# Allegro board LAY-97012_A1.brd
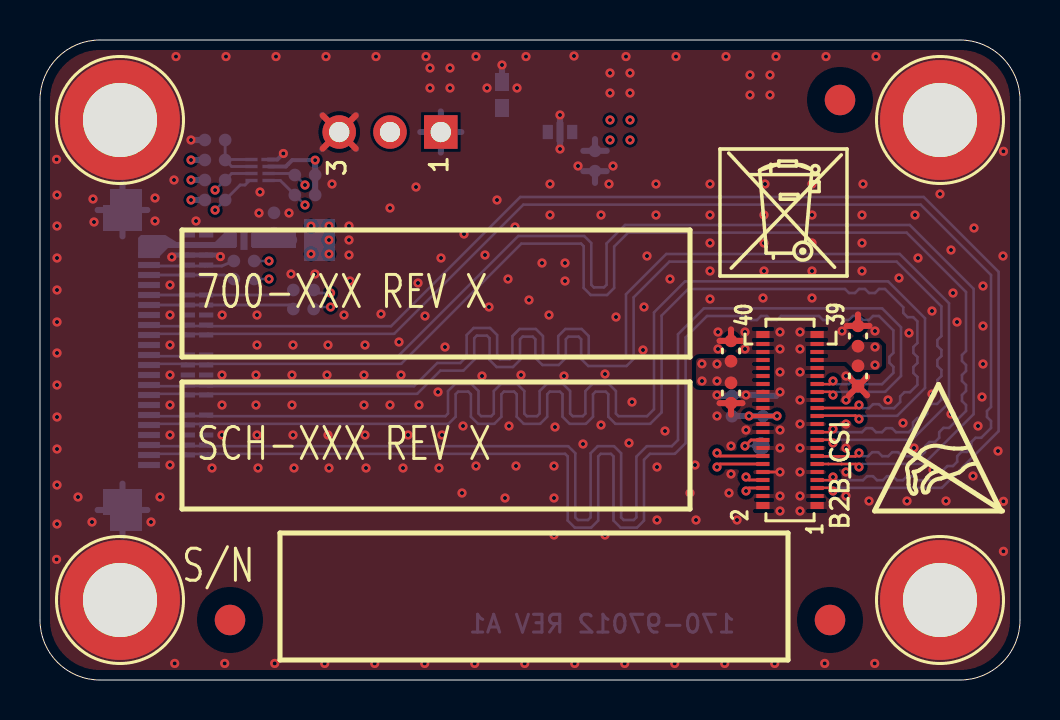
[diagram p0: board, top side]
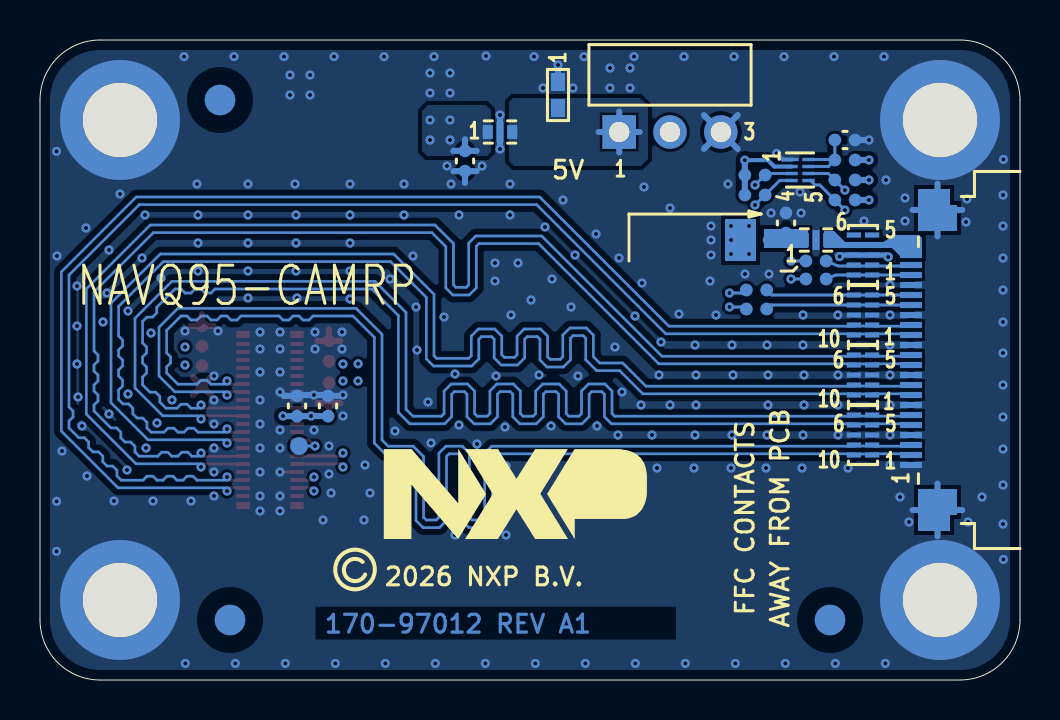
[diagram p1: board, bottom side, seen from below]

Outline 49 x 32 mm; copper layers: TOP, L2_GND1, L3_SIG1, L4_SIG2, L5_GND2, BOTTOM. Coordinates in mm from the lower left corner of the outline.
Outline path: 0,29 arc(0.88,31.12) 3,32 46,32 arc(48.12,31.12) 49,29 49,3 arc(48.12,0.88) 46,0 3,0 arc(0.88,0.88) 0,3 0,29

## Design rules (mm)
constraint set DEFAULT: min track width 0.145
net group MIPI_CSI: nets MIPI_CSI_CLK_N MIPI_CSI_D0_N MIPI_CSI_D1_N MIPI_CSI_D2_N MIPI_CSI_D3_N
net group MIPI_CSI_CLK_: nets MIPI_CSI_CLK_P
net group MIPI_CSI_D0_: nets MIPI_CSI_D0_P
net group MIPI_CSI_D1_: nets MIPI_CSI_D1_P
net group MIPI_CSI_D2_: nets MIPI_CSI_D2_P
net group MIPI_CSI_D3_: nets MIPI_CSI_D3_P
net group POWER: nets N20087079 VDD_1V8 VDD_CON_3V3

## Placement (name value [footprint] x y rotation side)
BH1  MH3.7_6  [MH236-146P]  4 28 0 top
BH2  MH3.7_6  [MH236-146P]  45 28 0 top
BH3  MH3.7_6  [MH236-146P]  4 4 0 top
BH4  MH3.7_6  [MH236-146P]  45 4 0 top
C6  0.1uF  [CC0402_25]  8.75 27 180 bottom
C7  1uF  [CC0402_25]  40.9 17.2 90 top
C8  1uF  [CC0402_25]  34.55 16.45 90 top
C9  1uF  [CC0402_25]  34.6 13.7 90 bottom
C10  0.1uF  [CC0402_25]  34.55 14.35 270 top
C11  0.1uF  [CC0402_25]  36.15 13.7 90 bottom
C12  0.1uF  [CC0402_25]  40.9 15.2 270 top
C13  0.1uF  [CC0402_25]  11.7 22.85 90 bottom
C14  0.1uF  [CC0402_25]  27.75 25.95 270 bottom
D1  IP4292CZ10-TBR  [XSON10_0P5_1P1X2P6MM]  7.85 12.25 0 bottom
D2  IP4292CZ10-TBR  [XSON10_0P5_1P1X2P6MM]  7.85 15.25 0 bottom
D3  IP4292CZ10-TBR  [XSON10_0P5_1P1X2P6MM]  7.85 18.25 0 bottom
D4  IP4292CZ10-TBR  [XSON10_0P5_1P1X2P6MM]  7.85 21.25 0 bottom
D5  PESD0402  [0402_MLP]  23.1 29.25 270 bottom
FL1  0.1uF  [CC_FIL_0402]  26 27.4 180 bottom
FL2  0.1uF  [CC_FIL_0402]  10.2 22 180 bottom
J3  CONN FPC/FFC 22  [CON_FFC_22_0P5_SM_RA_87H]  2.45 16 90 bottom
J4  HDR 1X3 RA  [HDR1X3M_100_TH_RA]  20.04 27.4 270 bottom
NOREF  -  []  36.48 17.86 0 top
NOREF#2  -  []  47.86 28.9 0 top
NOREF#3  -  []  33.7 11.64 0 top
NOREF#4  -  []  10.57 26.02 0 top
NOREF#5  -  []  41.75 8.45 0 top
NOREF#6  -  []  10.57 24.98 90 top
NOREF#7  -  []  4 4 0 top
NOREF#8  -  []  10.2 22 0 top
NOREF#9  -  []  -409.52 -356.24 0 top
NOREF#10  -  []  6.86 28.9 0 top
NOREF#11  -  []  44.84 0 90 top
NOREF#12  -  [unnamed#2]  40 29 0 top
NOREF#13  -  []  -5.05 17.68 0 top
NOREF#14  -  []  33.23 11.64 0 top
NOREF#15  -  []  38.52 8.14 90 top
NOREF#16  -  []  9.59 22 0 top
NOREF#17  -  []  -26.08 -35.35 0 top
NOREF#18  -  []  10.81 21.64 90 top
NOREF#19  -  []  12 1 0 top
NOREF#20  -  []  5.45 10.75 90 top
NOREF#21  -  []  10.57 24.98 0 top
NOREF#22  -  []  4.9 8 90 top
NOREF#23  -  [unnamed#2]  39.5 3 0 top
NOREF#24  -  []  4.9 8 90 top
NOREF#25  -  []  7.1 8.55 0 top
NOREF#26  -  [unnamed#2]  9.5 3 0 top
NOREF#27  -  []  0.91 31.15 0 top
NOREF#28  -  []  10.5 24.82 90 top
NOREF#29  -  []  34.5 11.64 0 top
NOREF#30  -  []  34 20.2 0 top
NOREF#31  -  []  0 6.75 90 top
NOREF#32  -  []  6.86 4.9 0 top
NOREF#33  -  []  7.1 16.15 0 top
NOREF#34  -  []  47.86 4.9 0 top
NOREF#35  -  []  41.77 11.64 90 top
NOREF#36  -  []  10.5 24.82 0 top
NOREF#37  -  []  0 28.52 0 top
NOREF#38  -  []  25.39 27.4 0 top
NOREF#39  -  []  5.17 24.48 0 top
NOREF#40  -  []  33.23 11.64 0 top
NOREF#41  -  []  0 6.75 0 top
NOREF#42  -  []  -384.25 163.44 0 top
NOREF#43  -  []  5.45 10.75 90 top
NOREF#44  -  []  26.61 27.04 90 top
NOREF#45  -  []  4.9 24 90 top
NOREF#46  -  []  26 27.4 0 top
NOREF#47  -  [unnamed#2]  39.5 3 180 bottom
NOREF#48  -  []  31.8 7.05 180 bottom
NOREF#49  -  [unnamed#2]  9.5 3 180 bottom
NOREF#50  -  [unnamed#2]  40 29 180 bottom
NOREF#51  -  []  33.25 5.5 180 bottom
P14  CON PLUG 2X20  [CON_2X20_0P4_9P52X1P85_SM]  37.5 13 90 top
R5  200K  [RC0402_25]  8.75 26 0 bottom
R8  0 OHM  [RC0402_25]  13.05 22 180 bottom
R9  0 OHM  [RC0402_25]  13.18 19.5 180 bottom
R10  0 OHM  [RC0402_25]  13.18 18.55 180 bottom
R38  2.2K  [RC0402_25]  13.25 25.25 180 bottom
R39  2.2K  [RC0402_25]  13.25 24.25 180 bottom
R40  2.2K  [RC0402_25]  8.75 24 0 bottom
R41  2.2K  [RC0402_25]  8.75 25 0 bottom
R42  0 OHM  [RC0402_25]  10.2 20.05 180 bottom
R43  0 OHM  [RC0402_25]  10.2 20.95 180 bottom
TP1  TP_35MIL  [TESTPOINT_35MIL]  36.05 11.7 180 bottom
U1  PCA9306JK  [X2SON8_0P35_1X1P35MM]  11 25.5 180 bottom

## Library data of the parts
BH1-BH4 = MOUNT_HOLE
C6-C14 = CAP_NP
D1-D4 = PUSB3F96_DFN2510A_10P
D5 = DIODE_TVS_BIDIR
FL1 FL2 = EMIFILTER_NFM21P
J3 = CON22_2SH
J4 = CONN_HDR_3X1
P14 = HDR_2X20_4S
R5 R8-R10 R38-R43 = RES
TP1 = T POINT R: Tolerance: TOLERANCE; User Part Number: 510-75618
U1 = PCA9306_TSSOP8

## Footprints (pads in the part's own frame, mm; a bottom-side part is the same pattern mirrored in y, then rotated)
0402_MLP
  rect 0.9x0.7 smd: 1(-0.65,0) 2(0.65,0)
CC0402_25
  round 0.635 smd: 1(-0.508,0) 2(0.508,0)
CC_FIL_0402
  rect 0.508x0.711 smd: 1(-0.61,0) 3(0.61,0)
  rect 0.356x0.991 smd: 2(0,0)
CON_2X20_0P4_9P52X1P85_SM
  rect 0.203x0.66 smd: 1(-3.8,-1.355) 2(-3.8,1.355) 3(-3.4,-1.355) 4(-3.4,1.355) 5(-3,-1.355) 6(-3,1.355) 7(-2.6,-1.355) 8(-2.6,1.355) 9(-2.2,-1.355) 10(-2.2,1.355) 11(-1.8,-1.355) 12(-1.8,1.355) 13(-1.4,-1.355) 14(-1.4,1.355) 15(-1,-1.355) 16(-1,1.355) 17(-0.6,-1.355) 18(-0.6,1.355) 19(-0.2,-1.355) 20(-0.2,1.355) 21(0.2,-1.355) 22(0.2,1.355) 23(0.6,-1.355) 24(0.6,1.355) 25(1,-1.355) 26(1,1.355) 27(1.4,-1.355) 28(1.4,1.355) 29(1.8,-1.355) 30(1.8,1.355) 31(2.2,-1.355) 32(2.2,1.355) 33(2.6,-1.355) 34(2.6,1.355) 35(3,-1.355) 36(3,1.355) 37(3.4,-1.355) 38(3.4,1.355) 39(3.8,-1.355) 40(3.8,1.355)
  rect 0.356x0.66 smd: SH1(-4.275,-1.355) SH2(-4.275,1.355) SH3(4.275,-1.355) SH4(4.275,1.355)
CON_FFC_22_0P5_SM_RA_87H
  rect 0.305x1.092 smd: 1(-5.25,3) 2(-4.75,3) 3(-4.25,3) 4(-3.75,3) 5(-3.25,3) 6(-2.75,3) 7(-2.25,3) 8(-1.75,3) 9(-1.25,3) 10(-0.75,3) 11(-0.25,3) 12(0.25,3) 13(0.75,3) 14(1.25,3) 15(1.75,3) 16(2.25,3) 17(2.75,3) 18(3.25,3) 19(3.75,3) 20(4.25,3) 21(4.75,3) 22(5.25,3)
  custom 2.1x1.95 smd: S1(-7.5,1.675) S2(7.5,1.675)
HDR1X3M_100_TH_RA
  rect 1.676x1.676 hole 1.016: 1(0,0)
  round 1.676 hole 1.016: 2(0,2.54) 3(0,5.08)
MH236-146P
  round 5.994 hole 3.708: 1(0,0)
RC0402_25
  round 0.635 smd: 1(-0.508,0) 2(0.508,0)
TESTPOINT_35MIL
  round 0.889 smd: 1(0,0)
unnamed#2
  round 1.524 smd: (0,0)
X2SON8_0P35_1X1P35MM
  rect 0.66x0.17 smd: 1(-0.4,0.525)
  rect 0.61x0.17 smd: 2(-0.425,0.175) 3(-0.425,-0.175) 4(-0.425,-0.525) 5(0.425,-0.525) 6(0.425,-0.175) 7(0.425,0.175) 8(0.425,0.525)
XSON10_0P5_1P1X2P6MM
  rect 0.711x0.254 smd: 1(-0.457,1) 2(-0.457,0.5) 3(-0.457,0) 4(-0.457,-0.5) 5(-0.457,-1) 6(0.457,-1) 7(0.457,-0.5) 8(0.457,0) 9(0.457,0.5) 10(0.457,1)

## Nets
GND: BH1.1 BH2.1 BH3.1 BH4.1 C6.2 C7.2 C8.2 C9.2 C10.2 C11.2 C12.2 C13.2 C14.2 D1.3 D1.8 D2.3 D2.8 D3.3 D3.8 D4.3 D4.8 D5.1 FL1.2 FL2.2 J3.1 J3.4 J3.7 J3.10 J3.13 J3.16 J3.19 J3.S1 J3.S2 J4.3 P14.1 P14.2 P14.7 P14.8 P14.13 P14.14 P14.18 P14.19 P14.20 P14.24 P14.25 P14.26 P14.28 P14.31 P14.33 P14.38 P14.39 P14.40 P14.SH1 P14.SH2 P14.SH3 P14.SH4 U1.1
VDD_1V8: C9.1 C11.1 P14.22 R38.1 R39.1 U1.2
VDD_CON_3V3: D4.4 D4.7 FL2.3(OUTPUT) J3.22
VDD_SYS_3V3: C8.1 C10.1 P14.30 P14.32 P14.34 P14.36 R5.1 R8.1 R40.1 R41.1
VDD_SYS_5V0: C7.1 C12.1 C14.1 FL1.1 P14.35 P14.37
CAM1_IO1: P14.10 R10.1
CAM1_IO1_CON: D3.4 D3.7 J3.17 R10.2
CAM1_IO2: P14.12 R9.1
CAM1_IO2_CON: D3.5 D3.6 J3.18 R9.2
CCM_CLKO1_FLEXIO1_IO26: P14.16 TP1.1(TP)
CON_DISP_5V0: D5.2(A2) FL1.3(OUTPUT) J4.1
I3C2B_CAM1_SCL: P14.6 R38.2 U1.3
I3C2B_CAM1_SDA: P14.4 R39.2 U1.4
MIPI_CSI_CLK_N: D2.1 D2.10(NC4) J3.8 P14.17
MIPI_CSI_CLK_P: D2.2 D2.9 J3.9 P14.15
MIPI_CSI_D0_N: D1.1 D1.10(NC4) J3.2 P14.29
MIPI_CSI_D0_P: D1.2 D1.9 J3.3 P14.27
MIPI_CSI_D1_N: D1.4 D1.7 J3.5 P14.23
MIPI_CSI_D1_P: D1.5 D1.6 J3.6 P14.21
MIPI_CSI_D2_N: D2.4 D2.7 J3.11 P14.11
MIPI_CSI_D2_P: D2.5 D2.6 J3.12 P14.9
MIPI_CSI_D3_N: D3.1 D3.10(NC4) J3.14 P14.5
MIPI_CSI_D3_P: D3.2 D3.9 J3.15 P14.3
SCL_3V3: R41.2 R42.1 U1.6
SCL_3V3_CON: D4.1 D4.10(NC4) J3.20 R42.2
SDA_3V3: R40.2 R43.1 U1.5
SDA_3V3_CON: D4.2 D4.9 J3.21 R43.2
N20059909: C6.1 R5.2 U1.7(VREF2) U1.8
N20087079: C13.1 FL2.1 R8.2

Pads without a net: D4 5 6; J4 2

## Via types
v1: diameter 0.457, hole 0.203, TOP to BOTTOM, 313 vias

## Routing (per net, layer and track width the routed paths; a pad name or vN(x,y) marks a point on that pad's centre or on a via; arc(x,y) is an arc through that point)
GND: length 59
  TOP w0.13: v1(37,10.4) P14.8
  TOP w0.305: C10.2 35.12,13.84 ; C10.2 34.55,13.27 ; C10.2 33.98,13.84 ; C7.2 41.47,17.71 ; C7.2 40.9,18.28 ; C7.2 40.33,17.71 ; C12.2 41.35,15.15 ; C12.2 40.45,14.24 ; C12.2 41.35,14.24 ; C12.2 40.45,15.15 ; C8.2 34.55,17.53 ; C8.2 35.12,16.96 ; C8.2 33.98,16.96 ; J4.3 15.78,26.58 ; J4.3 15.78,28.22 ; J4.3 14.14,26.58 ; J4.3 14.14,28.22
  L2_GND1 w0.305: 14.12,26.55 J4.3 ; J4.3 15.8,26.55 ; J4.3 14.12,28.24 ; J4.3 15.8,28.24
  L3_SIG1 w0.305: 14.12,26.55 J4.3 ; J4.3 15.8,26.55 ; J4.3 14.12,28.24 ; J4.3 15.8,28.24
  L4_SIG2 w0.305: 14.12,28.24 J4.3 ; J4.3 15.8,28.24 ; J4.3 15.8,26.55 ; J4.3 14.12,26.55
  L5_GND2 w0.305: J4.3 15.8,28.24 ; J4.3 14.12,28.24 ; J4.3 14.12,26.55 ; J4.3 15.8,26.55
  BOTTOM w0.2: v1(12.17,26.32) 11.87,26.02 U1.1
  BOTTOM w0.25: v1(9.02,21.17) 9.01,21.17 8.93,21.25 D4.8 D4.3 6.73,21.25 6.63,21.15 v1(6.59,21.15)
  BOTTOM w0.305: 4.12,23.5 4.12,24.82 ; 4.12,23.5 4.12,22.18 ; 4.12,23.5 5.37,23.5 ; 4.12,23.5 2.88,23.5 ; J4.3 15.8,28.24 ; J4.3 15.8,26.55 ; J4.3 14.12,28.24 ; J4.3 14.12,26.55 ; v1(26,28.25) FL1.2 v1(26,26.55) ; v1(33.85,14.25) 33.89,14.21 C9.2 34.64,14.25 v1(35.3,14.25) 36.11,14.25 C11.2 36.81,14.21 v1(37,14.4) ; C6.2 v1(7.55,27) ; 4.12,7.18 J3.S1 ; J3.S1 5.37,8.5 ; J3.S1 4.12,9.82 ; J3.S1 2.88,8.5 ; 27.75,24.86 C14.2 ; C14.2 28.33,25.44 ; C14.2 27.17,25.44 ; D5.1 v1(23.1,30.75)
  vias: v1(0.83,26.03) v1(0.83,6.03) v1(0.85,24.25) v1(0.85,22.7) v1(0.85,21.1) v1(0.85,19.5) v1(0.85,17.9) v1(0.85,16.35) v1(0.85,14.75) v1(0.85,13.15) v1(0.85,11.55) v1(0.85,9.75) v1(0.85,7.8) v1(1.9,9.15) v1(2.65,24.05) v1(2.6,7.9) v1(2.7,22.9) v1(5.55,7.9) v1(5.75,24.1) v1(5.75,22.95) v1(6,9.15) v1(6.5,19.75) v1(6.5,18.25) v1(6.5,16.75) v1(6.5,15.25) v1(6.5,13.75) v1(6.5,12.25) v1(6.5,10.75) v1(6.7,25) v1(6.74,0.83) v1(6.8,31.17) v1(7.8,22.95) v1(8.6,10.6) v1(9.11,18.25) v1(9.1,15.25) v1(9.1,13.75) v1(9.1,12.25) v1(9.24,0.83) v1(9.3,31.17) v1(10.85,18.25) v1(10.85,16.75) v1(10.8,15.25) v1(10.8,13.75) v1(10.85,12.25) v1(10.9,10.6) v1(11,24.4) v1(10.95,23.35) v1(11.74,0.83) v1(11.8,31.17) v1(12.45,23.35) v1(12.55,20.3) v1(12.6,15.25) v1(12.6,13.75) v1(12.65,16.75) v1(12.65,12.25) v1(12.7,10.6) v1(13.75,20.3) v1(14.24,0.83) v1(14.3,31.17) v1(14.35,15.25) v1(14.4,16.75) v1(14.4,12.25) v1(14.45,10.6) v1(14.6,24.8) v1(15.2,18.25) v1(15.45,22.7) v1(15.45,22) v1(15.45,21.25) v1(15.5,19.95) v1(16.25,16.75) v1(16.2,15.25) v1(16.2,13.75) v1(16.25,12.25) v1(16.3,10.6) v1(16.74,0.83) v1(16.8,31.17) v1(17.05,18.3) v1(17.5,23.6) v1(17.5,13.75) v1(17.95,16.9) v1(18.05,15.25) v1(18.15,10.6) v1(18.4,12.25) v1(18.8,24.65) v1(18.9,19.85) v1(18.95,13.75) v1(19.25,18.2) v1(19.24,0.83) v1(19.3,31.17) v1(19.5,30.6) v1(19.5,29.6) v1(19.9,14.4) v1(19.95,10.6) v1(20.05,21.1) v1(20.1,12.25) v1(20.25,16.65) v1(20.5,30.6) v1(20.5,29.6) v1(21.15,12.7) v1(21.1,9.35) v1(21.2,22.3) v1(21.74,0.83) v1(21.8,31.17) v1(21.8,10.7) v1(22.1,15.2) v1(22.25,21.25) v1(22.35,29.6) v1(22.45,18.65) v1(22.85,24) v1(23.25,9.1) v1(23.4,20.05) v1(23.45,12.7) v1(23.75,22.65) v1(23.8,10.7) v1(23.85,29.6) v1(24.05,15.25) v1(24.24,0.83) v1(24.3,31.17) v1(24.45,19) v1(25.1,20.85) v1(25.45,18.25) v1(25.5,24.8) v1(25.5,23.25) v1(25.7,10.7) v1(25.7,9.1) v1(25.7,7.25) v1(25.75,12.65) v1(26.25,20.85) v1(26.25,19.95) v1(26.2,15.2) v1(26.7,31.2) v1(26.74,0.83) v1(26.9,25.7) v1(27.15,11.8) v1(28.05,23.25) v1(28.05,12.75) v1(28.25,15.3) v1(28.25,7.25) v1(28.45,24.8) v1(28.5,30.35) v1(28.5,29.35) v1(28.65,25.7) v1(28.8,18.15) v1(29.24,0.83) v1(29.3,31.17) v1(29.45,11.85) v1(29.5,30.35) v1(29.5,29.35) v1(29.6,13.9) v1(30.15,16.5) v1(30.2,18.65) v1(30.35,21.2) v1(30.8,24.8) v1(30.8,23.25) v1(30.85,10.65) v1(30.85,8) v1(31.25,12.45) v1(31.5,20.05) v1(31.74,0.83) v1(31.8,31.17) v1(32.5,9.35) v1(32.75,10.75) v1(32.8,8) v1(33.5,24.8) v1(33.5,23.25) v1(33.5,21.85) v1(33.5,20.45) v1(33.5,19.05) v1(33.9,17.4) v1(33.9,16.55) v1(33.85,13.2) v1(34.24,0.83) v1(34.3,31.17) v1(34.45,9.35) v1(34.55,11.7) v1(34.55,10.3) v1(34.85,8) v1(35.25,17.4) v1(35.25,16.55) v1(35.3,12.5) v1(35.5,30.25) v1(35.5,29.25) v1(36.15,19.1) v1(36.25,24.8) v1(36.2,23.25) v1(36.2,21.85) v1(36.2,20.45) v1(36.5,30.25) v1(36.5,29.25) v1(36.74,0.83) v1(36.8,31.17) v1(37,17.4) v1(37,16.55) v1(37,15.4) v1(37,12.5) v1(37,11.6) v1(37,9.2) v1(37,8.45) v1(38,17.4) v1(38,16.55) v1(38,15.4) v1(38,14) v1(38,12.8) v1(38,11.6) v1(38,10.4) v1(38,9.2) v1(38,8.45) v1(38.6,24.8) v1(38.6,23.25) v1(38.6,21.85) v1(38.6,20.45) v1(38.6,19.1) v1(39.24,0.83) v1(39.3,31.17) v1(40.1,17.45) v1(40.3,15.2) v1(40.3,14) v1(40.3,12.8) v1(40.3,11.6) v1(40.3,10.4) v1(40.3,9.2) v1(41.15,24.8) v1(41.1,23.25) v1(41.1,21.85) v1(41.1,20.45) v1(41.45,8.95) v1(41.74,0.83) v1(41.8,31.17) v1(41.75,17.45) v1(42.4,14) v1(42.95,20.1) v1(43.15,12.85) v1(43.35,8.95) v1(43.45,17.35) v1(43.7,11.6) v1(43.75,23.25) v1(43.9,21.1) v1(44.6,18.45) v1(44.6,14.3) v1(44.65,10.5) v1(45,24.3) v1(45.3,8.95) v1(45.55,21.5) v1(45.55,13.3) v1(45.65,19.35) v1(45.85,17.9) v1(46.65,10.2) v1(46.7,22.6) v1(46.9,12.7) v1(47.15,19.7) v1(47.15,17.7) v1(47.15,15.8) v1(47.1,14.15) v1(47.9,11.45) v1(48.15,21.2) v1(48.17,26.43) v1(48.17,8.93) v1(48.17,6.43)
VDD_1V8: length 36.8
  TOP w0.2: v1(35.45,13.2) P14.22 v1(36.85,13.2)
  L4_SIG2 w0.5: v1(13.76,25.99) 14.95,25.5 19.35,25.5 32.4,12.45 34.05,12.45 34.8,13.2 v1(35.45,13.2) v1(36.85,13.2)
  BOTTOM w0.2: U1.2 12.29,25.68 12.61,25.99 v1(13.76,25.99)
  BOTTOM w0.305: R39.1 R38.1 v1(13.76,25.99) ; v1(36.85,13.2) 36.84,13.19 C11.1 35.46,13.19 v1(35.45,13.2) 34.61,13.2 C9.1
VDD_SYS_3V3: length 2.1
  BOTTOM w0.305: R41.1 v1(7.55,25) ; R5.1 v1(7.55,26) ; R40.1 v1(7.55,24)
  vias: v1(13.55,22.7) v1(13.55,21.3) v1(14.45,22.7) v1(14.45,22) v1(14.45,21.3) v1(33.09,15.81) v1(33.1,14.95) v1(33.85,15.8) v1(33.85,14.95)
VDD_SYS_5V0: length 2.7
  L4_SIG2 w0.5: v1(41.75,15.75) v1(41.75,16.65)
  BOTTOM w0.305: 27.17,26.46 C14.1 ; C14.1 28.33,26.46 ; C14.1 27.75,27.04
  vias: v1(28.5,28) v1(28.5,27) v1(29.5,28) v1(29.5,27)
CAM1_IO1: length 27.4
  TOP w0.145: v1(33.85,10.65) 34,10.8 P14.10
  L3_SIG1 w0.135: v1(14.53,18.65) 14.53,17.62 18.25,13.9 18.25,13.15 21.35,10.05 33.25,10.05 v1(33.85,10.65)
  BOTTOM w0.145: R10.1 13.78,18.65 v1(14.53,18.65)
CAM1_IO1_CON: length 7.3
  BOTTOM w0.145: R10.2 12.47,18.75 D3.7 D3.4 J3.17
CAM1_IO2: length 25.9
  TOP w0.145: P14.12 34,11.2 v1(33.85,11.35)
  L3_SIG1 w0.135: v1(33.85,11.35) 25.85,11.35 23.85,13.35 22.7,13.35 18.4,17.65 16.85,17.65 15.15,19.35 v1(14.53,19.35)
  BOTTOM w0.145: v1(14.53,19.35) 13.83,19.35 R9.1
CAM1_IO2_CON: length 7.3
  BOTTOM w0.145: R9.2 12.42,19.25 D3.6 D3.5 J3.18
CCM_CLKO1_FLEXIO1_IO26: length 1.8
  TOP w0.145: P14.16 35.55,12 v1(35.25,11.7)
  BOTTOM w0.145: v1(35.25,11.7) TP1.1
CON_DISP_5V0: length 4.1
  BOTTOM w0.3: J4.1 20.04,28.43 ; J4.1 21.07,27.4 ; J4.1 20.04,26.37 ; J4.1 19.01,27.4
I3C2B_CAM1_SCL: length 31.2
  TOP w0.145: P14.6 35.45,10 v1(35.3,10.15)
  L4_SIG2 w0.135: v1(13.25,24.75) 14.46,24.25 18.1,24.25 32.5,9.85 35,9.85 v1(35.3,10.15)
  BOTTOM w0.145: U1.3 12.67,25.32 R38.2 12.75,25.25 v1(13.25,24.75)
I3C2B_CAM1_SDA: length 31.7
  TOP w0.145: v1(35.3,9.45) 35.45,9.6 P14.4
  L4_SIG2 w0.135: v1(13.25,23.75) 14.22,23.35 16.65,23.35 31.25,8.75 34.6,8.75 v1(35.3,9.45)
  BOTTOM w0.145: U1.4 12.02,24.98 R39.2 12.75,24.25 v1(13.25,23.75)
MIPI_CSI_CLK_N: length 65.3
  TOP w0.13: P14.17 38.87,12.39 39.49,12.39 v1(39.65,12.55)
  BOTTOM w0.13: J3.8 5.51,14.31 7.33,14.31 D2.1 7.44,14.3 8.26,14.3 D2.10 8.37,14.31 18.86,14.31 20.02,15.47 21.17,15.47 21.71,16.01 21.71,17.09 21.84,17.22 22.35,17.22 22.48,17.09 22.48,16 22.83,15.65 23.65,15.65 24,16 24,17.04 24.13,17.17 24.64,17.17 24.77,17.04 24.77,16.1 25.12,15.75 25.94,15.75 26.29,16.1 26.29,17.04 26.42,17.17 26.93,17.17 27.06,17.04 27.06,16.05 27.41,15.7 29.33,15.7 29.68,16.05 29.68,19.13 31.47,20.92 42.83,20.92 45.07,18.68 45.07,17.2 44.87,17 44.87,16.7 45.07,16.5 45.07,16.2 44.87,16 44.87,15.7 45.07,15.5 45.07,15.2 44.87,15 44.87,14.7 45.07,14.5 45.07,14.02 44.85,13.8 44.57,13.8 44.36,13.59 44.36,13.31 44.15,13.1 43.86,13.1 43.65,12.88 43.65,12.6 43.44,12.39 42.8,12.39 42.6,12.59 42.3,12.59 42.1,12.39 41.8,12.39 41.6,12.59 41.3,12.59 41.1,12.39 39.81,12.39 v1(39.65,12.55)
MIPI_CSI_CLK_P: length 65.4
  TOP w0.13: v1(39.65,11.85) 39.49,12.01 38.87,12.01 P14.15
  BOTTOM w0.13: v1(39.65,11.85) 39.81,12.01 43.6,12.01 45.45,13.86 45.45,18.84 42.99,21.3 31.31,21.3 29.3,19.29 29.3,16.21 29.17,16.08 27.57,16.08 27.44,16.21 27.44,17.2 27.08,17.55 26.26,17.55 25.91,17.2 25.91,16.26 25.78,16.13 25.28,16.13 25.15,16.26 25.15,17.2 24.79,17.55 23.97,17.55 23.62,17.2 23.62,16.16 23.49,16.03 22.99,16.03 22.86,16.16 22.86,17.25 22.5,17.6 21.68,17.6 21.33,17.25 21.33,16.17 21.01,15.85 19.86,15.85 18.7,14.69 8.37,14.69 D2.9 8.26,14.7 7.44,14.7 D2.2 7.33,14.69 5.51,14.69 J3.9
MIPI_CSI_D0_N: length 64.6
  TOP w0.13: v1(39.65,14.95) 39.49,14.79 38.87,14.79 P14.29
  BOTTOM w0.13: J3.2 5.51,11.31 7.33,11.31 D1.1 7.44,11.3 8.26,11.3 D1.10 8.37,11.31 26.26,11.31 26.39,11.18 26.39,7.97 26.74,7.62 27.56,7.62 27.91,7.97 27.91,11.18 28.04,11.31 28.55,11.31 28.68,11.18 28.68,7.97 29.03,7.62 29.85,7.62 30.2,7.97 30.2,11.01 30.5,11.31 31.75,11.31 32.28,11.84 32.28,17.13 33.35,18.2 35.35,18.2 35.55,18 35.85,18 36.05,18.2 36.35,18.2 36.55,18 36.85,18 37.05,18.2 38.95,18.2 39.15,18 39.45,18 39.65,18.2 39.95,18.2 40.15,18 40.45,18 40.65,18.2 40.95,18.2 41.15,18 41.45,18 41.65,18.2 41.95,18.2 42.67,17.48 42.67,16.36 42.47,16.16 42.47,15.86 42.67,15.66 42.67,15.36 42.1,14.79 41.15,14.79 40.95,14.99 40.65,14.99 40.45,14.79 39.81,14.79 v1(39.65,14.95)
MIPI_CSI_D0_P: length 64.7
  TOP w0.13: P14.27 38.87,14.41 39.49,14.41 v1(39.65,14.25)
  BOTTOM w0.13: v1(39.65,14.25) 39.81,14.41 42.26,14.41 43.05,15.2 43.05,17.64 42.11,18.58 33.19,18.58 31.9,17.29 31.9,12 31.59,11.69 30.34,11.69 29.82,11.17 29.82,8.13 29.69,8 29.19,8 29.06,8.13 29.06,11.34 28.7,11.69 27.88,11.69 27.53,11.34 27.53,8.13 27.4,8 26.9,8 26.77,8.13 26.77,11.34 26.41,11.69 8.37,11.69 D1.9 8.26,11.7 7.44,11.7 D1.2 7.33,11.69 5.51,11.69 J3.3
MIPI_CSI_D1_N: length 65.4
  TOP w0.13: v1(40.95,13.75) 40.8,13.6 P14.23
  BOTTOM w0.13: v1(40.95,13.75) 41.11,13.59 41.45,13.59 41.65,13.79 41.95,13.79 42.15,13.59 42.7,13.59 43.01,13.9 43.01,14.18 43.22,14.39 43.5,14.39 43.87,14.76 43.87,15.15 43.67,15.35 43.67,15.65 43.87,15.85 43.87,16.15 43.67,16.35 43.67,16.65 43.87,16.85 43.87,17.93 43.66,18.14 43.38,18.14 43.16,18.35 43.16,18.64 42.25,19.55 41.95,19.55 41.75,19.35 41.45,19.35 41.25,19.55 40.95,19.55 40.75,19.35 40.45,19.35 40.25,19.55 32.41,19.55 31.08,18.22 31.08,13.38 30.51,12.81 28.77,12.81 28.42,13.16 28.42,14.29 28.29,14.42 27.78,14.42 27.65,14.29 27.65,13.16 27.3,12.81 26.48,12.81 26.13,13.16 26.13,14.29 26,14.42 25.49,14.42 25.36,14.29 25.36,13.16 25.01,12.81 24.19,12.81 23.84,13.16 23.84,14.29 23.71,14.42 23.2,14.42 23.07,14.29 23.07,13.16 22.72,12.81 21.9,12.81 21.55,13.16 21.55,14.29 21.42,14.42 20.91,14.42 20.78,14.29 20.78,13.16 20.43,12.81 8.37,12.81 D1.7 8.26,12.8 7.44,12.8 D1.4 7.33,12.81 5.51,12.81 J3.5
MIPI_CSI_D1_P: length 65.5
  TOP w0.13: P14.21 38.88,13.22 40.78,13.22 v1(40.95,13.05)
  BOTTOM w0.13: J3.6 5.51,13.19 7.33,13.19 D1.5 7.44,13.2 8.26,13.2 D1.6 8.37,13.19 20.27,13.19 20.4,13.32 20.4,14.45 20.75,14.8 21.57,14.8 21.93,14.45 21.93,13.32 22.06,13.19 22.56,13.19 22.69,13.32 22.69,14.45 23.04,14.8 23.86,14.8 24.22,14.45 24.22,13.32 24.35,13.19 24.85,13.19 24.98,13.32 24.98,14.45 25.33,14.8 26.15,14.8 26.51,14.45 26.51,13.32 26.64,13.19 27.14,13.19 27.27,13.32 27.27,14.45 27.62,14.8 28.44,14.8 28.8,14.45 28.8,13.32 28.93,13.19 30.35,13.19 30.7,13.54 30.7,18.38 32.25,19.93 42.41,19.93 44.25,18.09 44.25,14.6 42.86,13.21 41.11,13.21 v1(40.95,13.05)
MIPI_CSI_D2_N: length 65.1
  TOP w0.13: v1(40.95,11.35) 40.78,11.18 39.92,11.18 38.88,11.18 P14.11
  BOTTOM w0.13: v1(40.95,11.35) 41.11,11.19 41.41,11.19 41.61,11.39 41.91,11.39 42.11,11.19 42.41,11.19 42.61,11.39 42.91,11.39 43.11,11.19 44.04,11.19 44.25,11.4 44.25,11.68 44.46,11.9 44.75,11.9 44.96,12.11 44.96,12.39 45.17,12.6 45.45,12.6 46.3,13.45 46.3,13.75 46.1,13.95 46.1,14.25 46.3,14.45 46.3,14.75 46.1,14.95 46.1,15.25 46.3,15.45 46.3,15.75 46.1,15.95 46.1,16.25 46.3,16.45 46.3,19.4 43.33,22.37 29.41,22.37 28.71,21.67 28.71,19.6 28.36,19.25 27.54,19.25 27.18,19.6 27.18,21.69 27.05,21.82 24.07,21.82 18.06,15.81 8.37,15.81 D2.7 8.26,15.8 7.44,15.8 D2.4 7.33,15.81 5.51,15.81 J3.11
MIPI_CSI_D2_P: length 65.2
  TOP w0.13: v1(40.95,10.65) 40.8,10.8 40.08,10.8 P14.9
  BOTTOM w0.13: J3.12 5.51,16.19 7.33,16.19 D2.5 7.44,16.2 8.26,16.2 D2.6 8.37,16.19 17.9,16.19 23.91,22.2 27.21,22.2 27.56,21.85 27.56,19.76 27.69,19.63 28.2,19.63 28.33,19.76 28.33,21.83 29.25,22.75 43.49,22.75 46.68,19.56 46.68,13.29 44.2,10.81 41.11,10.81 v1(40.95,10.65)
MIPI_CSI_D3_N: length 65.1
  TOP w0.13: v1(39.65,10.15) 39.49,9.99 38.87,9.99 P14.5
  BOTTOM w0.13: v1(39.65,10.15) 39.81,9.99 41.15,9.99 41.35,10.19 41.65,10.19 41.85,9.99 42.15,9.99 42.35,10.19 42.65,10.19 42.85,9.99 43.15,9.99 43.35,10.19 43.65,10.19 43.85,9.99 44.94,9.99 45.15,10.2 45.15,10.48 45.36,10.7 45.65,10.7 45.86,10.91 45.86,11.19 46.07,11.4 46.35,11.4 46.57,11.62 46.57,11.9 46.78,12.11 47.06,12.11 47.55,12.6 47.55,12.95 47.35,13.15 47.35,13.45 47.55,13.65 47.55,20.25 44.03,23.77 24.17,23.77 17.71,17.31 8.37,17.31 D3.10 8.26,17.3 7.44,17.3 D3.1 7.33,17.31 5.51,17.31 J3.14
MIPI_CSI_D3_P: length 65.2
  TOP w0.13: v1(39.65,9.45) 39.49,9.61 38.87,9.61 P14.3
  BOTTOM w0.13: J3.15 5.51,17.69 7.33,17.69 D3.2 7.44,17.7 8.26,17.7 D3.9 8.37,17.69 17.55,17.69 24.01,24.15 44.19,24.15 47.93,20.41 47.93,12.44 45.1,9.61 39.81,9.61 v1(39.65,9.45)
SCL_3V3: length 9
  L4_SIG2 w0.135: v1(11.45,20.05) 12.05,20.65 12.05,21.2 v1(8.75,24.5)
  BOTTOM w0.145: v1(8.75,24.5) R41.2 9.58,25.32 U1.6 ; R42.1 v1(11.45,20.05)
SCL_3V3_CON: length 4.3
  BOTTOM w0.145: J3.20 D4.1 D4.10 9.21,20.25 R42.2
SDA_3V3: length 6.9
  L4_SIG2 w0.135: v1(11.45,20.95) 8.9,23.5 v1(8.75,23.5)
  BOTTOM w0.145: R43.1 v1(11.45,20.95) ; v1(8.75,23.5) R40.2 10.01,24.75 10.25,24.75 10.47,24.98 U1.5
SDA_3V3_CON: length 4.4
  BOTTOM w0.145: R43.2 9.09,20.7 8.36,20.7 D4.9 8.26,20.7 7.44,20.7 D4.2 7.34,20.7 5.5,20.7 J3.21
N20059909: length 3.8
  BOTTOM w0.145: R5.2 C6.1 ; R5.2 9.58,25.68 U1.7 ; R5.2 9.28,26.02 U1.8

## Copper pours and planes (outline as drawn; the poured copper is in the pictures)
GND on TOP: 48.5,3 47.77,1.23 46,0.5 3,0.5 1.23,1.23 0.5,3 0.5,29 1.23,30.77 3,31.5 46,31.5 47.77,30.77 48.5,29 ; 13 cut-outs
GND on BOTTOM: 48.5,3 47.77,1.23 46,0.5 3,0.5 1.23,1.23 0.5,3 0.5,29 1.23,30.77 3,31.5 46,31.5 47.77,30.77 48.5,29 ; 13 cut-outs
GND on L2_GND1: 48.5,3 47.77,1.23 46,0.5 3,0.5 1.23,1.23 0.5,3 0.5,29 1.23,30.77 3,31.5 46,31.5 47.77,30.77 48.5,29 ; 1 cut-out
GND on L3_SIG1, L4_SIG2, L5_GND2: 48.5,3 47.77,1.23 46,0.5 3,0.5 1.23,1.23 0.5,3 0.5,29 1.23,30.77 3,31.5 46,31.5 47.77,30.77 48.5,29
VDD_CON_3V3 on BOTTOM (solid shape): 9.8,21.6 6.4,21.6 6,21.2 5.99,21.15 4.9,21.15 4.9,22.1 5.05,22.25 6.26,22.25 6.83,21.9 8.75,21.9 9.3,22.45 9.8,22.45
VDD_SYS_3V3 on BOTTOM (solid shape): 14.75,20.95 13.2,20.95 13.2,23.05 14.75,23.05
VDD_SYS_3V3 on TOP: 32.8,15.9 32.86,16.04 33,16.1 35.61,16.1 35.61,16.1 36.5,16.1 36.5,15.9 35.65,15.9 35.6,15.85 35.6,15.75 35.65,15.7 36.5,15.7 36.5,15.5 35.65,15.5 35.6,15.45 35.6,15.35 35.65,15.3 36.5,15.3 36.5,15.1 35.65,15.1 35.6,15.05 35.6,14.95 35.65,14.9 36.5,14.9 36.5,14.7 35.61,14.7 35.61,14.7 33,14.7 32.86,14.76 32.8,14.9
VDD_SYS_3V3 on L3_SIG1: 7.05,20.82 7.4,20.48 17.73,20.48 23.6,14.6 34.27,14.6 34.5,14.82 34.5,18.1 34.05,18.55 25.77,18.55 19.88,24.45 10.1,24.45 8.2,26.35 7.45,26.35 7.05,25.95
VDD_SYS_5V0 on TOP: 39.4,16.25 39.4,16.15 39.35,16.1 38.5,16.1 38.5,15.9 40.3,15.9 40.7,15.5 41.9,15.5 42.1,15.7 42.1,16.7 41.9,16.9 40.7,16.9 40.3,16.5 38.5,16.5 38.5,16.3 39.35,16.3
VDD_SYS_5V0 on BOTTOM: 26.45,28.5 26.45,26.4 26.65,26.2 29.65,26.2 29.9,26.45 29.9,28.45 29.6,28.75 26.7,28.75
VDD_SYS_5V0 on L3_SIG1: 28,28.25 28,26.55 28.45,26.1 33.85,26.1 40.7,19.25 40.7,15.8 41.35,15.15 43.15,15.15 43.75,15.75 43.75,20.65 35.8,28.6 28.35,28.6
CON_DISP_5V0 on BOTTOM: 18.6,28.7 18.6,26.05 18.95,25.7 25.3,25.7 25.55,25.95 25.55,28.9 25.35,29.1 19,29.1
N20087079 on BOTTOM (solid shape): 12.8,21.6 10.6,21.6 10.6,22.55 12.8,22.55

## Text on the board
BOTTOM: 170-97012 REV A1 | 09 | L6_SS
Board Geometry/Soldermask Bottom: 11 | SECONDARY SOLDERMASK
Ref Des/Silkscreen Bottom: AWAY FROM PCB | 10 | SECONDARY SILKSCREEN | NAVQ95-CAMRP
User.Comments: 1 OF 1 | TEST PROBE | 1/1 | 1
TOP: 04 | L1_PS
Board Geometry/Soldermask Top: 02 | PRIMARY SOLDERMASK
Ref Des/Silkscreen Top: 03 | PRIMARY SILKSCREEN
L2_GND1: 05 | L2_GND1
L3_SIG1: 06 | L3_SIG1
L4_SIG2: 07 | L4_SIG2
L5_GND2: 08 | L5_GND2
XSECTION_CHART: *  SURFACE - AIR 0 MM | *  DIELECTRIC - SOLDERMASK 0.02 MM | L1 TOP CONDUCTOR - COPPER 0.04 MM | *  DIELECTRIC - ISOLA PCL370HR 0.088 MM | L2 L2_GND1 PLANE - COPPER 0.016 MM | *  DIELECTRIC - ISOLA PCL370HR 0.1 MM | L3 L3_SIG1 CONDUCTOR - COPPER 0.016 MM | *  DIELECTRIC - ISOLA PCL370HR 0.996 MM | L4 L4_SIG2 CONDUCTOR - COPPER 0.016 MM | L5 L5_GND2 PLANE - COPPER 0.016 MM | L6 BOTTOM CONDUCTOR - COPPER 0.04 MM | DESIGN CROSS SECTION CHART | ___________________________ | TOTAL THICKNESS 1.556 MM | 1-6
DIMENSION: LAYERS | L1_PS | L3_SIG1 | L4_SIG2 | L6_SS | TRACE WIDTH | 0.145 | 0.135 | SE | IMPEDANCE | 50.00 | N/A | 0.130 | TRACE SPACING | 0.25 | DIFF | 100.00 | REFERENCE LAYER | 2 | 5 | SCALE: NONE | BOARD THICKNESS TOLERANCE +/-10% | 21. THE MANUFACTURE HAS THE OPTION TO ADD COPPER THIEVING ON OUTER AND INNER LAYERS, | 1. THIS DRAWING SPECIFIES THE REQUIREMENTS FOR A PRINTED WIRING BOARD IN ACCORDANCE. | WITH SPECIFICATION IPC-6012 CLASS 2 (LATEST REVISION). | 2. THE PWB MUST BE LEAD FREE ASSEMBLY PROCESS COMPATIBLE AND MUST BE ABLE TO HANDLE | A MINIMUM OF 5 CYCLES AT 260 DEGREES CELSIUS FOR 10 SECONDS. | 3. BASE MATERIAL - LAMINATE AND PREPREG SHALL MEET IPC-4101B-26, 83 or 98 | 4. COPPER FOIL WEIGHT - SEE STACKUP DETAIL 'A' | 5. CHARACTERISTIC IMPEDANCE - SEE DETAIL 'B' | 6. MINIMUM CONDUCTIVE WIDTH/SPACING TO BE 0.13mm/0.127mm | 7. PLATING FINISH BOTH SIDES ENIG TO MEET THE REQUIREMENTS OF IPC-4552 (LATEST REVISION). | 16. SUPPLIER MARKINGS - PREFERABLY ON THE SECONDARY SIDE, WHERE SPACE PERMITS. | 12. PRINTED WIRING BOARDS TO BE SEPPARATED BY FOIL OR AN EQUIVALENT METHOD IN THE PACKAGE, | 10. SILKSCREEN - WHITE EPOXY OR ACRYLIC INK, BOTH SIDES. NO SILKSCREEN ON ANY EXPOSED COPPER FEATURE. | 13. DFM CHECK MUST BE RUN ON BOARD DATA BEFORE BUILDING BOARDS, | UNLESS PRIOR APPROVAL IS GIVEN IN WRITING BY NXP. | 14. TEARDROPS MAYBE ADDED AT THE FAB HOUSE TO ALL SIGNAL LAYERS. | 15. TWO SOLDER SAMPLES TO BE PROVIDED. | 17. THE PWB WILL BE MARKED AS LEAD FREE BY USE OF AN INK STAMP Pb | 18. THE PWB WILL BE MARKED AS LEAD FREE PROCESS COMPATIBLE BY USE OF AN INK STAMP 260 C | 20. FINISHED PCB MUST BE PANELIZED FOR ASSEMBLY ACCORDING TO CONTRACT MANUFACTURERS REQUIREMENTS. | 9. SOLDERMASK - TO MEET THE REQUIREMENTS OF IPC-SM-840E (OR LATEST REVISION). | 8. FAB VENDOR IS NOT ALLOWED TO USE ODB FOR FABRICATION. CAN BE USED ONLY FOR REFERENCE. | NOT ALLOWING MECHANICAL CONTACT BETWEEN THEM TO AVOID SCRATCHES. | THE ADDITION OF RAILS AND .125"NON-PLATED TOOLING HOLES ARE AT THE DISCRETION OF | CONTRACT MANUFACTURER.PANELIZATION MUST BE APPROVED BY CONTRACT MANUFACTURER. | KEEP A MINIMUM DISTANCE OF .100" FROM ANY BOARD FEATURES. | GREEN COLOR, BOTH SIDES. MODIFICATION OF SOLDERMASK IS NOT ALLOWED WITHOUT WRITTEN PERMISSION FROM NXP. | TYPE: LPI OR EQUIVALENT. | Tg - MUST BE GREATER THAN OR EQUAL TO 180 DEGREES CELSIUS. | Td - MUST BE GREATER THAN OR EQUAL TO 340 DEGREES CELSIUS. | - MUST BE UL RECOGNIZED AND MUST HAVE AN ID THAT CONFORMS TO UL94V-0 | B. DIAMETER OR SIZE = +/- .002 OF ORIGINAL DATA | A. LOCATION = +/-.002" OF PLATED PADS. | 19. A. ALL PLATED AND NON-PLATED THROUGH HOLES ARE TO BE DRILLED AT PRIMARY DRILL STEP, EXCEPT AS NOTED | IN NOTE 20B. THESE HOLE LOCATION TOLERANCES ARE TO BE +/-.002 IN REFERENCE TO THE PRIMARY DATUM. | 19 | DETAIL | IMPEDANCE REQUIREMENTS | IMPEDANCE TOLERANCE IS 10% | LAYER STACKUP | PRIMARY DATUM | GRID ORIGIN | B | A
PASTEMASK_TOP: 01 | PASTEMASK TOP
User.5: 12 | SECONDARY PASTEMASK
User.20: 1 | 2 | 49 | 50
User.21: 1 | 5 | 20 | 6 | 10 | 16 | 15 | 11 | AK | A | E | 52 | C | 3 | 40 | 31 | 30 | 21 | P10 | P12 | P9 | 4 | P1 | P2 | P14 | 2 | P | 14 | 49 | 50 | 9 | 13 | 12 | CARD PUSH STROKE | CARD SET POSITION | CARD EJECT STROKE | 8 | 19 | 7 | C3 | CD | AA | 42 | 29 | 43 | 28 | 56 | 17 | 24 | 25 | 32 | 58 | 68 | 74 | 57 | 67 | 75 | PCB EDGE SIDE | PCB EDGE DIRECTION | BOARD EDGE NOT DEFINED | BY MANUFACTURER | ON | PUSH STROKE POSITION | CARD LOCK POSITION | CARD EJECT POSITION | +
User.22: 50 | 2 | 1 | 49
User.23: 9 | 13 | 1 | A | C | 5 | 3 | E | 16 | 28 | 43 | 74 | 75 | 21 | 20 | 11 | 10 | 2 | 12 | 14 | 8 | 4 | 7 | 39 | 40 | B12 | A1 | A12 | B1 | 24 | 6 | 25 | 36 | 48 | 37 | 50 | 49 | PCB EDGE SIDE | PCB EDGE | EDGE NOT DEFINED BY MANUFACTURER | PCB EDGE DIRECTION BOARD
User.24: 40 | 2 | 39 | 1
User.25: 9 | 13 | 1 | A | C | 5 | 3 | E | 16 | 28 | 43 | 74 | 75 | 21 | 20 | 11 | 10 | 2 | 12 | 14 | 8 | 4 | 7 | 39 | 40 | B12 | A1 | A12 | B1 | 24 | 6 | 25 | 36 | 48 | 37 | 50 | 49 | PCB EDGE SIDE | PCB EDGE | EDGE NOT DEFINED BY MANUFACTURER | PCB EDGE DIRECTION BOARD | 170-95869 REV A
User.27: OF 12
User.30: 22. THIS FAB_VIAFILL.ART SHOWS LOCATIONS OF VIA-IN-PAD TO BE FILLED. | 1/1 | 2 | 3
User.31: 24. | 1/1 | 3 | CAD DESIGNER: DELETE THIS FAB PAGE IF BACKDRILL IS NOT USED ON THIS DESIGN. | FAB SUPPLIER: DISREGARD THIS PAGE IF BACKDRILL REQUIRMENT IS NOT PROVIDED.
User.45: 09-07-26 | C.O. | D.N. | R.P. | TOP TO LAYER X | BACK DRILL REFERENCE | BOTTOM TO LAYER X | LAYER X | MUST CUT LAYER | LAYER X+1 | MUST NOT CUT LAYER | LAYER X-1 | A1 | MPN Modified | FIGURE | FINISHED_SIZE | 0.2032 | 1.016 | 3.7084 | DRILL CHART: TOP to BOTTOM | ALL UNITS ARE IN MILLIMETERS | DRILLED_SIZE | - | PLATED | QTY | 313 | 3 | 4 | 320 | TOTAL HOLES:
